# Altium PCB light.PcbDoc
Units mm, origin at the board's own origin, x right, y up, seen from the top; angles counter-clockwise.
Board outline 34.14 x 118.21 mm, 4 copper layers (Top Layer, GND-Layer 1, VCC-Layer 2, Bottom Layer); 90 components, 63 nets, 296 pads, 160 vias.
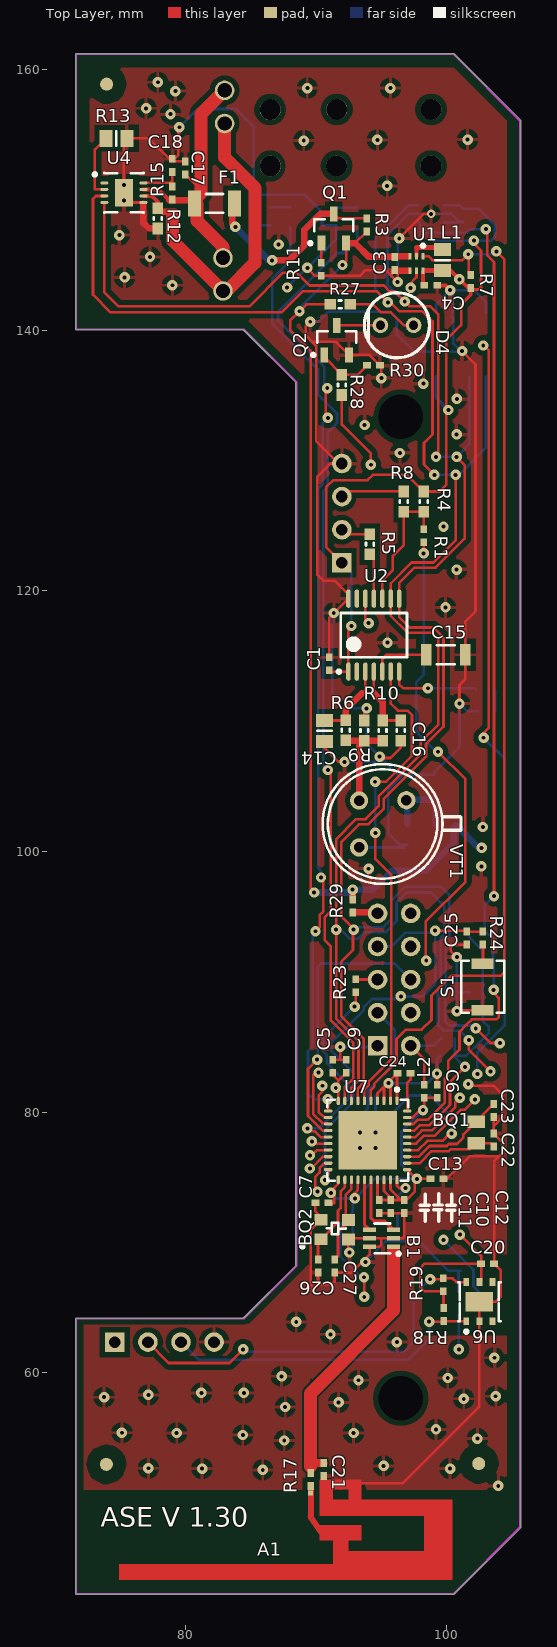
[diagram p0: Top Layer view]
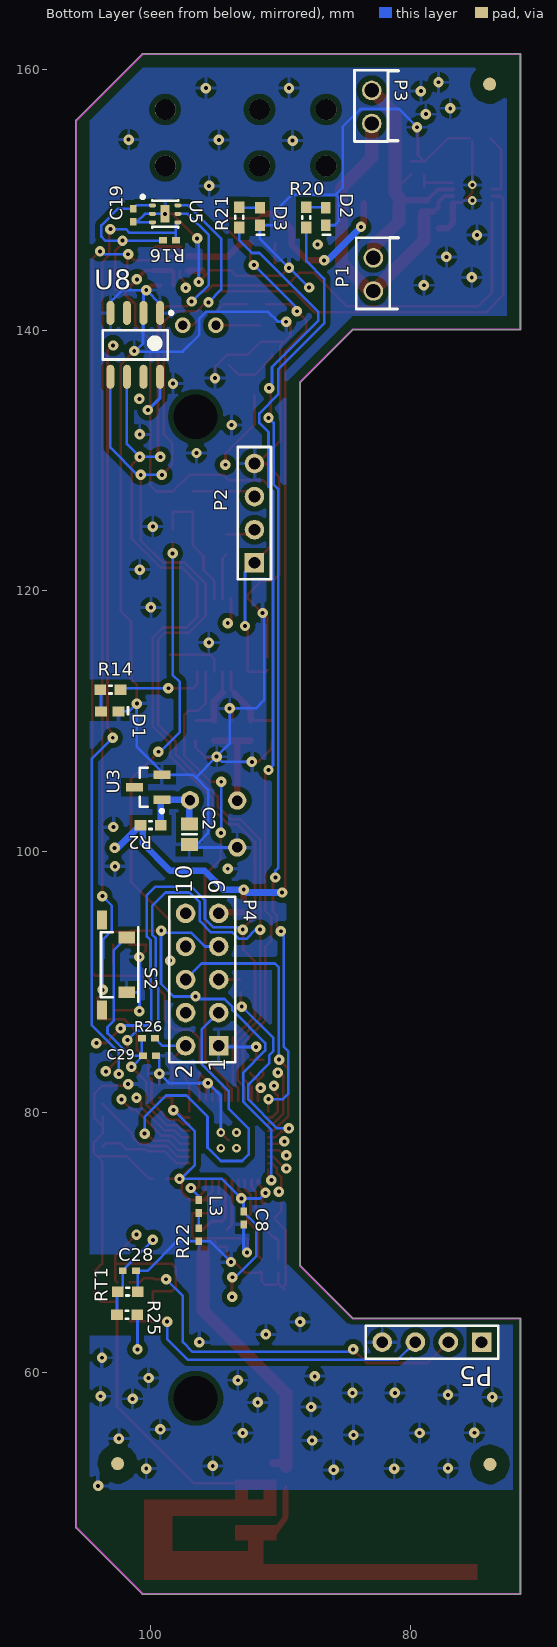
[diagram p1: Bottom Layer view, seen from below]
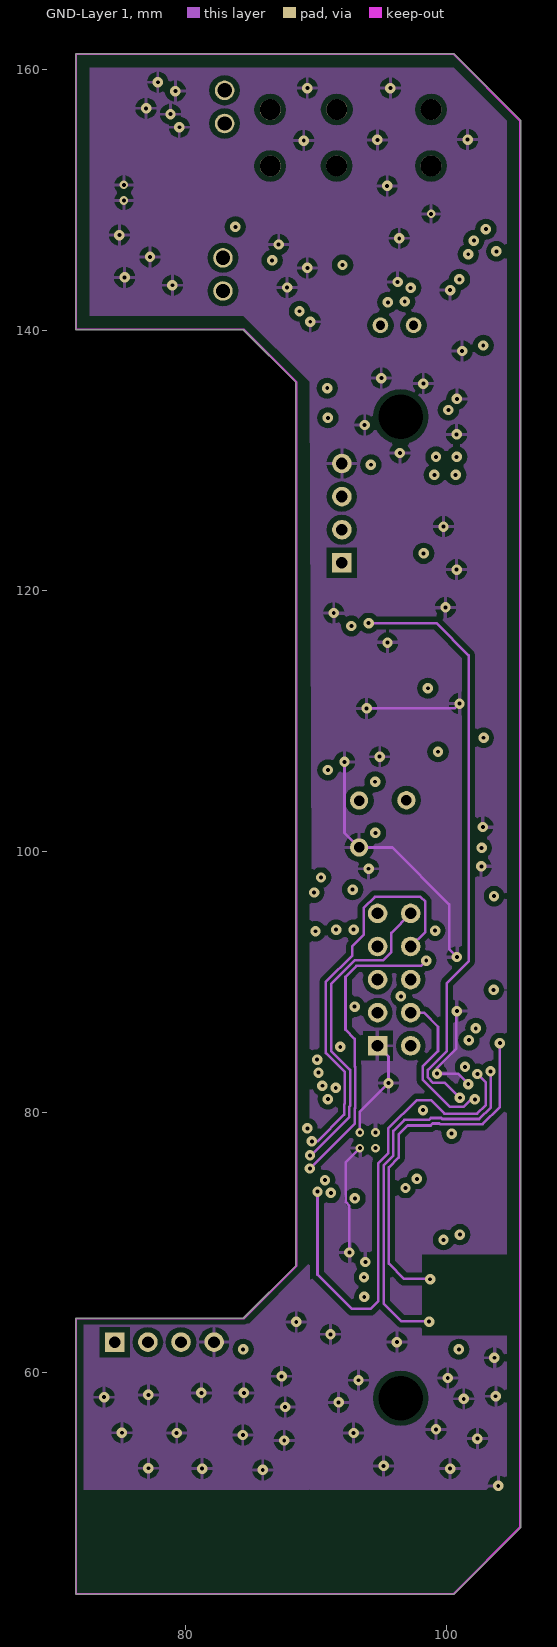
[diagram p2: GND-Layer 1]
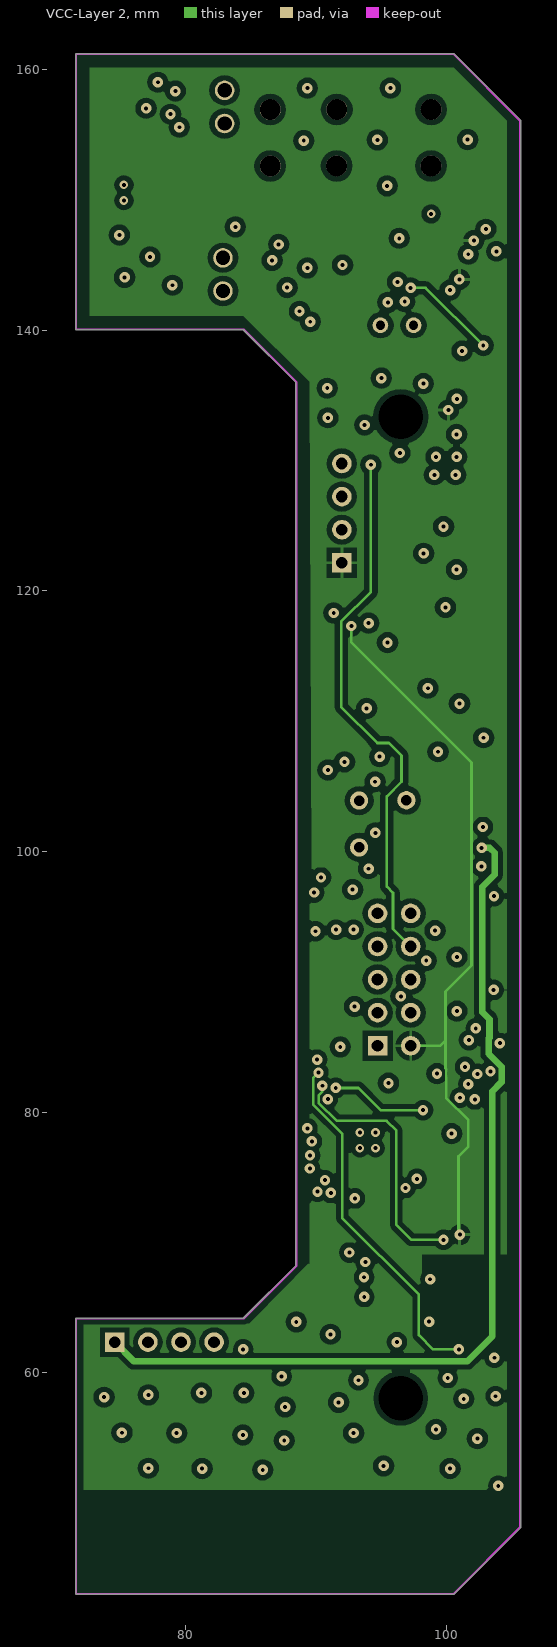
[diagram p3: VCC-Layer 2]

## Layer stack, top to bottom
Top Layer: signal copper 0.0356
Dielectric: core 0.32, FR-4, Dk 4.8
GND-Layer 1: signal copper 0.0356
Dielectric: prepreg 0.32, FR-4, Dk 4.8
VCC-Layer 2: signal copper 0.0356
Dielectric: core 0.32, FR-4, Dk 4.8
Bottom Layer: signal copper 0.0356

## Board outline
71.578,43.053 ccw(c71.628,43.053) 71.628,43.003 100.584,43.003 ccw(c100.584,43.053) 100.62,43.018 100.62,43.017 105.7,48.097 105.699,48.097 ccw(c105.664,48.133) 105.714,48.133 105.714,156.083 ccw(c105.664,156.083) 105.699,156.119 105.7,156.119 100.62,161.199 100.62,161.198 ccw(c100.584,161.163) 100.584,161.213 71.628,161.213 ccw(c71.628,161.163) 71.578,161.163 71.578,140.081 ccw(c71.628,140.081) 71.628,140.031 84.434,140.031 88.469,135.996 88.469,68.22 84.434,64.185 71.628,64.185 ccw(c71.628,64.135) 71.578,64.135

## Design rules (kind name [scope] priority, off if disabled: settings)
Clearance Clearance_2 [InNet('NetB1_1')] p1: gap=0.16
Clearance Clearance_1 [InPolygon] p2: gap=0.4
Clearance [All] p3: gap=0.2
PolygonConnect [All] p1: connectstyle=Relief reliefconductorwidth=0.254 reliefentries=4 polygonreliefangle="90 Angle"
RoutingVias [All] p1: holewidth=0.711 width=1.27 viastyle="Through Hole" minholewidth=0.711 minwidth=1.27 maxholewidth=0.711 maxwidth=1.27
SilkscreenOverComponentPads [All] p1: minsilkscreentomaskgap=0.254
SolderMaskExpansion [All] p1: expansion=0
Width [All] p1: maxlimit=1 minlimit=0.2 preferedwidth=0.254
27 further rules are at their usual default settings.

## Components (designator, comment, footprint, x,y, rotation, side; value= is the part's Value field where it differs from the comment)
A1 "ANT" "F ant" 89.85,51.025 r180 top
B1 "BALUN" 2450BM15A0002 95.05,70.325 r180 top
BQ1 "Crystal" FC-12M 102.3,78.45 r90 top
BQ2 "Crystal" 403C11A32M00000 91.525,71.05 r0 top
C1 "Capacitor" 0402 91.025,114.4 r90 top
C2 "Capacitor" 6-0805_L 97,101.325 r90 bottom
C3 "Capacitor" 0402 96.05,145.125 r270 top
C4 "Capacitor" 0402 98.825,143.45 r0 top
C5 "Capacitor" 0402 91.311,83.52 r90 top
C6 "Capacitor" 0402 99.3,81.6 r90 top
C7 "Capacitor" 0402 90.475,73.05 r180 top
C8 "Capacitor" 0402 92.837,71.865 r270 bottom
C9 "Capacitor" 0402 92.327,83.52 r90 top
C10 "Capacitor" 0402 95.758,72.754 r270 top
C11 "Capacitor" 0402 94.869,72.754 r270 top
C12 "Capacitor" 0402 96.774,72.754 r270 top
C13 "Capacitor" 0402 99.3,74.9 r0 top
C14 "Capacitor" 6-0805_L 90.65,109.25 r90 top
C15 "Capacitor" 1206 99.975,115.1 r180 top
C16 "Tantal Cap" 0603 96.525,109.275 r270 top
C17 "Capacitor" 0402 80,152.45 r90 top
C18 "Capacitor" 0402 79,152.65 r90 top
C19 "Capacitor" 0402 101.3,148.825 r270 bottom
C20 "Capacitor" 0402 103.182,68.379 r0 top
C21 "Capacitor" 0402 90.6,52.575 r270 top
C22 "Capacitor" 0402 103.65,77.85 r270 top
C23 "Capacitor" 0402 103.65,80.125 r90 top
C24 "Capacitor" 0402 96.775,83 r180 top
C25 "Capacitor" 0402 101.575,93.35 r270 top
C26 "Capacitor" 0402 90.17,68.182 r90 top
C27 "Capacitor" 0402 91.44,68.182 r90 top
C28 "Capacitor" 0402 101.6,67.825 r180 bottom
C29 "Capacitor" 0402 100.05,84.325 r180 bottom
D1 "Led" LED0603 103.1,110.75 r180 bottom
D2 "Led" LED0603 86.525,148.725 r270 bottom
D3 "Led" LED0603 91.583,148.726 r270 bottom
D4 "Led" TSHF5410 97.5,140.375 r180 top
F1 "Fuse, slow 0.2A" SF1206S0502 82.225,149.725 r0 top
L1 "Inductor" 6-0805_L 99.725,145.375 r270 top
L2 "Inductor" 0402 98.325,81.6 r270 top
L3 "Inductor" 0402 96.266,72.754 r90 bottom
P1 "Connector" BAT_CON 82.875,145.55 r270 bottom
P2 "Header 4" HDR1X4 92,122.15 r90 bottom
P3 "Connector" BAT_CON 83,158.4 r270 bottom
P4 "*" HDR2X5 94.742,85.09 r90 bottom
P5 "Header 4" HDR1X4 74.575,62.35 r0 bottom
Q1 "IRLML6302GTRPBF" SOT-23_N 91.375,147.8 r90 top
Q2 "KST3904MTF" SOT-23_N 91.6,139.225 r90 top
R1 "Resistor" 0402 98.275,124.225 r270 top
R2 "Resistor" 0603 99.975,102.025 r0 bottom
R3 "Blob" 0402 93.925,148.075 r90 top
R4 "Resistor" 0603 98.275,126.85 r270 top
R5 "Res" 0603 94.15,123.575 r90 top
R6 "Resistor" 0603 92.3,109.3 r270 top
R7 "Resistor" 0402 101.9,143.725 r90 top
R8 "Res" 0603 96.75,126.85 r90 top
R9 "Resistor" 0603 93.725,109.275 r270 top
R10 "Resistor" 0603 95.125,109.275 r270 top
R11 "Resistor" 0402 90.425,144.675 r270 top
R12 "Resistor" 0603 77.875,148.575 r270 top
R13 "Resistor" 6-0805_L 74.7,154.725 r0 top
R14 "Resister" 0603 103.05,112.425 r0 bottom
R15 "Resistor" 0402 79,150.525 r90 top
R16 "Resistor" 0402 98.525,146.9 r180 bottom
R17 "Blob" 0402 89.6,51.8 r270 top
R18 "Resistor" 0402 99.8,64.475 r90 top
R19 "Resistor" 0402 99.775,66.75 r270 top
R20 "Resister" 0603 88.025,148.65 r90 bottom
R21 "Resister" 0603 93.175,148.659 r90 bottom
R22 "Resistor" 0402 96.266,70.595 r270 bottom
R23 "Blob" 0402 93.075,89.7 r270 top
R24 "Resistor" 0402 102.825,93.35 r90 top
R25 "Resistor" 0603 101.775,64.45 r180 bottom
R26 "Resistor" 0402 100.125,85.675 r0 bottom
R27 "Resister" 0603 91.875,141.975 r0 top
R28 "Resister" 0603 92,135.8 r270 top
R29 "Blob" 0402 92.825,95.825 r90 top
R30 "Resistor" 0402 94.425,137.3 r0 top
RT1 "Thermistor" 0603 101.725,66.225 r180 bottom
S1 "Button" B3U-3000P 102.8,89.625 r270 top
S2 "Button" TL3330 101.8,91.3 r270 bottom
U1 "TPS62730" 6SON 97.725,145.125 r270 top
U2 "MSP430" TSOP14 94.45,116.6 r90 top
U3 "LM385M3-2.5" SOT23 100.15,104.925 r0 bottom
U4 "STC3100" DFN8 75.275,150.55 r0 top
U5 "MAX44009" QFN127P600-8N 98.85,148.925 r180 bottom
U6 "Hum\Temp Sensor" QFN6 102.547,65.458 r90 top
U7 "CC2530F256" QFN40 93.98,77.834 r270 top
U8 "M24M02" SO8 101.15,138.875 r270 bottom
VT1 "PIR sensor" TO5 95.123,102.108 r0 top

## Footprints (in the part's own frame and the unit in brackets; to place one, negate y for a bottom-side part, rotate by r counter-clockwise, add the part's x,y. Pads: shape width x height; smd on the part's side, far side on the other; paste and mask are expansions set on the pad)
6-0805_L [mm] "Chip Resistor, Body 2.0x1.2mm, IPC High Density"
  rect 1x1.3 smd: 1(-0.8,0) 2(0.8,0)
  silkscreen extent 0,-0.55 0,0.55, body extent -1.07,-0.7 1.07,0.7, height 0.7
6SON [mm] "IC DCDC CONV STP-DN SYNC LP 6SON"
  rect 0.5x0.25 smd: 1(-0.55,0.5) 2(-0.55,0) 3(-0.55,-0.5) 4(0.55,-0.5) 5(0.55,0) 6(0.55,0.5)
  silkscreen extent -1.47,0.38 -1.23,0.63, body extent -0.52,-0.75 0.53,0.75, height 0.6
0402 [mm] "Chip Capacitor, Body 1.0x0.5mm, IPC High Density"
  rect 0.6x0.5 smd: 1(-0.5,0) 2(0.5,0)
  body extent -0.55,-0.3 0.55,0.3, height 1.3
403C11A32M00000 [mm] "CRYSTAL 32MHZ 10PF SMD"
  rect 1x0.9 smd: 1(-1.125,-0.8) 2(0.975,-0.825) 3(0.975,0.675) 4(-1.125,0.7)
  silkscreen extent -2.67,-1.47 0.77,0.45, body extent -1.7,-1.22 1.53,1.15, height 0.85
0603 [mm] "0603, 2-Leads, Body 1,6x0,8mm, IPC High Density"
  rect 0.9x0.8 smd: 1(-0.775,0) 2(0.775,0)
  silkscreen extent -0.1,-0.3 0.1,0.3, body extent -0.8,-0.4 0.8,0.4, height 0.5
1206 [mm] "1206, 2-Leads, Body 3,2x1,6mm, IPC High Density"
  rect 0.8x1.65 smd: 1(-1.5,0) 2(1.5,0)
  silkscreen extent -0.7,-0.72 0.7,0.72, body extent -1.6,-0.8 1.6,0.8, height 0.5
2450BM15A0002 [mm]
  rect 1x0.35 smd: 1(-0.9,0.65) 2(-0.9,0) 3(-0.9,-0.65) 4(0.925,-0.65) 5(0.925,0) 6(0.925,0.65)
  silkscreen extent -1.43,-1.13 0.55,1.32, body extent -0.63,-1 0.63,1, height 0.7
B3U-3000P [mm] "Button, 2-Leads, Body 4,0x3,2mm, IPC High Density"
  rect 0.8x1.7 smd: 1(-1.775,0) 2(1.8,0)
  silkscreen extent -2,-1.65 2,1.65, body extent -2,-1.6 2,1.6, height 1.2
BAT_CON [mm]
  round 1.5 hole 1.1: 1(0,0) 2(2.54,0)
  silkscreen extent -1.55,-1.33 3.92,1.25
DFN8 [mm]
  oval 0.6x0.25 smd: 1(-1.5,0.75) 2(-1.5,0.25) 3(-1.5,-0.25) 4(-1.5,-0.75) 5(1.5,-0.75) 6(1.5,-0.25) 7(1.5,0.25) 8(1.5,0.75)
  rect 1.4x2.1 smd: 9(0,0)
  silkscreen extent -2.35,-1.53 1.5,1.53, body extent -1.5,-1.5 1.5,1.5, height 0.9
"F ant" [mm] "F antenna 2.4Ghz"
  rect 0.4x0.4 smd paste+0: 1(0.254,0.254)
  rect 3x0.01 smd: 2(-2.032,0)
  Top Layer region: -3.65,0 -2.65,0 -2.65,0.74 -3.65,0.74
  Top Layer region: -1.45,0 -0.45,0 -0.45,0.74 -1.45,0.74
  Top Layer region: -2.65,3.9 -1.45,3.9 -1.45,4.7 -2.65,4.7
  Top Layer region: -8.453,0.739 -3.653,0.739 -3.653,2.029 -8.453,2.029
  Top Layer region: -10.63,4.7 -1.45,4.7 -1.45,5.7 -10.63,5.7
  Top Layer region: -10.63,5.7 14.95,5.7 14.95,6.91 -10.63,6.91
  Top Layer region: -10.63,0.74 -8.45,0.74 -8.45,4.7 -10.63,4.7
  Top Layer region: -3.65,2.69 -0.45,2.69 -0.45,3.9 -3.65,3.9
  Top Layer region: -3.65,0.74 -0.45,0.74 -0.45,2.03 -3.65,2.03
  Top Layer region: 0,0 0.46,0 0.46,2.03 0,2.03
  Top Layer region: 0,2.03 0.379,2.29 -0.577,3.681 -0.956,3.42
  Top Layer region: 0,2.03 0.46,2.03 0.379,2.291
FC-12M [mm]
  rect 0.95x1.35 smd: 1(-0.825,0) 2(0.825,0)
  body extent -1.02,-0.6 1.02,0.6, height 0.6
HDR1X4 [mm] "Connector; Header; 4 Position"
  rect 1.5x1.5 hole 0.9: 1(0,0)
  round 1.5 hole 0.9: 2(2.54,0) 3(5.08,0) 4(7.62,0)
  silkscreen extent -1.27,-1.27 8.89,1.27
HDR2X5 [mm] "Connector; Header; 5x2 Position"
  rect 1.5x1.5 hole 0.9: 1(0,0)
  round 1.5 hole 0.9: 2(0,2.54) 3(2.54,0) 4(2.54,2.54) 5(5.08,0) 6(5.08,2.54) 7(7.62,0) 8(7.62,2.54) 9(10.16,0) 10(10.16,2.54)
  silkscreen extent -1.27,-1.27 11.43,3.81
LED0603 [mm] "Molded Diode, 2-Leads, Body 1,7x0,9mm, IPC High Density"
  rect 0.9x0.75 smd: 1(-0.675,0) 2(0.675,0)
  silkscreen extent 1.4,-0.23 1.4,0.32, body extent -0.9,-0.5 0.9,0.5, height 0.85
QFN6 [mm] "QFN, 6-Leads, Body 3,0x3,0mm (max), Pitch 1,00mm, IPC High Density"
  rect 0.6x0.45 smd: 1(-1.5,1) 2(-1.5,0) 3(-1.5,-1) 4(1.5,-1) 5(1.5,0) 6(1.5,1)
  rect 1.5x2.1 smd: 7(0,0)
  silkscreen extent -2.42,-1.63 1.5,1.63, body extent -1.5,-1.5 1.5,1.5, height 0.9
QFN40 [mm]
  oval 0.65x0.25 smd: 1(-3.025,2.25) 2(-3.025,1.75) 3(-3.025,1.25) 4(-3.025,0.75) 5(-3.025,0.25) 6(-3.025,-0.25) 7(-3.025,-0.75) 8(-3.025,-1.25) 9(-3.025,-1.75) 10(-3.025,-2.25) 21(3.025,-2.25) 22(3.025,-1.75) 23(3.025,-1.25) 24(3.025,-0.75) 25(3.025,-0.25) 26(3.025,0.25) 27(3.025,0.75) 28(3.025,1.25) 29(3.025,1.75) 30(3.025,2.25)
  oval 0.25x0.65 smd: 11(-2.25,-3.025) 12(-1.75,-3.025) 13(-1.25,-3.025) 14(-0.75,-3.025) 15(-0.25,-3.025) 16(0.25,-3.025) 17(0.75,-3.025) 18(1.25,-3.025) 19(1.75,-3.025) 20(2.25,-3.025) 31(2.25,3.025) 32(1.75,3.025) 33(1.25,3.025) 34(0.75,3.025) 35(0.25,3.025) 36(-0.25,3.025) 37(-0.75,3.025) 38(-1.25,3.025) 39(-1.75,3.025) 40(-2.25,3.025)
  rect 4.5x4.5 smd: 41(0,0)
  silkscreen extent -4.02,-3.1 3.1,3.1, body extent -3.08,-3.08 3.08,3.08, height 1
QFN127P600-8N [mm]
  oval 0.55x0.3 smd: 1(-0.975,0.65) 2(-0.975,0) 3(-0.975,-0.65) 4(0.975,-0.65) 5(0.975,0) 6(0.975,0.65)
  rect 0.7x1.35 smd: 7(0,0)
  silkscreen extent -1.85,-1.05 1,1.42, body extent -1,-1 1,1, height 0.6
SF1206S0502 [mm] "FUSE BOARD MNT 500MA 63VDC 1206"
  rect 1x2 smd: 1(-1.55,0) 2(1.55,0)
  silkscreen extent -0.65,-0.72 0.65,0.72, body extent -1.55,-0.77 1.55,0.77, height 0.6
SO8 [mm] "SOIC, 8-Leads, Body 5,0x4,0mm (max), Pitch 1,27mm, IPC High Density"
  oval 1.85x0.6 smd: 1(-2.45,1.905) 2(-2.45,0.635) 3(-2.45,-0.635) 4(-2.45,-1.905) 5(2.45,-1.905) 6(2.45,-0.635) 7(2.45,0.635) 8(2.45,1.905)
  silkscreen extent -2.57,-2.5 1.12,2.88, body extent -2,-2.5 2,2.5, height 1.75
SOT23 [mm]
  rect 1.3x0.65 smd: 1(-1.05,0.95) 2(-1.05,-0.95) 3(1.05,0)
  silkscreen extent -1.17,-1.5 0.65,1.95, body extent -0.65,-1.5 0.65,1.5, height 1
SOT-23_N [mm] "SOT23, 3-Leads, Body 2.9x1.3mm, Pitch 0.95mm, Lead Span 2.5mm, IPC Medium Density"
  rect 1.15x0.6 smd: 1(-1.125,0.95) 2(-1.125,-0.95) 3(1.125,0)
  silkscreen extent -1.25,-1.5 0.7,1.92, body extent -0.7,-1.5 0.7,1.5, height 1.1
TL3330 [mm] "SWITCH TACTILE SPST-NO 0.05A 12V"
  rect 0.9x1.27 smd: 1(-2.1,0) 2(2.1,0)
  rect 1.45x0.8 smd: 3(-3.45,-1.9) 3(3.45,-1.9)
  silkscreen extent -2.88,-1.97 2.83,0.87, body extent -3.88,-2.42 3.8,0.78, height 3.4
TO5 [mm]
  round 1.4 hole 0.8: 1(1.825,1.825) 2(-1.8,1.8) 3(-1.8,-1.8)
  silkscreen extent -4.6,-4.6 6.02,4.6, body extent -4.56,-4.59 4.6,4.59, height 4.8
TSHF5410 [mm] "EMITTER IR 5MM HI SPEED 890NM"
  round 1.2 hole 0.7: 1(0,0) 2(2.54,0)
  silkscreen extent -1.23,-2.5 3.77,2.5, body extent -1.23,-2.5 3.75,2.5, height 8.7
TSOP14 [mm] "TSOP, 14-Leads, Body 5,1x4,5mm (max), Pitch 0,65mm, IPC High Density"
  oval 1.4x0.35 smd: 1(-2.8,1.95) 2(-2.8,1.3) 3(-2.8,0.65) 4(-2.8,0) 5(-2.8,-0.65) 6(-2.8,-1.3) 7(-2.8,-1.95) 8(2.8,-1.95) 9(2.8,-1.3) 10(2.8,-0.65) 11(2.8,0) 12(2.8,0.65) 13(2.8,1.3) 14(2.8,1.95)
  silkscreen extent -2.92,-2.55 1.7,2.8, body extent -2.25,-2.55 2.25,2.55, height 1.2

## Part data
A1: "Inverted-F Antenna"
B1: "BALUN JTI MATCHED ZIGBEE"
BQ1: library part 6LC:308C, "CRYSTAL 32.768KHZ 12.5PF SMD"
BQ2: library part HC-49SMD, "CRYSTAL 32MHZ 10PF SMD"
C1 C7 C8 C9 C10 C11 C12 C13 C19 C20 C25 C28 C29: library part Cap, "CAP CER 0.1UF 10V 20% X5R 0402"
C2 C14: library part Cap, "CAP FILM 0.1UF 16VDC 0805"
C3 C4 C5: library part Cap, "CAP CER 2.2UF 6.3V 20% X5R 0402"
C6 C17 C24: library part Cap, "CAP CER 1UF 6.3V 10% X5R 0402"
C15: library part Cap, "CAP FILM 0.47UF 16VDC 1206"
C16: library part "Cap Pol2", "CAP CER 10UF 6.3V 20% X5R 0603"
C18: library part Cap, "CAP CER 0.22UF 10V 10% X5R 0402"
C21: library part Cap, "CAP CER 0.5PF 50V NP0 0402"
C22 C23: library part Cap, "CAP CER 22PF 50V 5% NP0 0402"
C26 C27: library part Cap, "CAP CER 15PF 50V 5% NP0 0402"
D1: library part LED0, "LED YELLOW ROUND CLEAR SMD"
D2: library part LED0, "LED RED ROUND CLEAR SMD"
D3: library part LED0, "LED GREEN CLEAR THIN 0603 SMD"
D4: library part LED0, "EMITTER IR 5MM HI EFF 940NM"
F1: library part "Fuse 2", "FUSE .200A 125V FAST 1206"
L1: "INDUCTOR 2.2UH 0805"
L2: "FILTER CHIP 1000 OHM 250MA 0402"
L3: "INDUCTOR 6.8NH 300MA 0402"
P1 P3: library part "Header 2", "CONN HEADER VERT 2POS .100 TIN"
P2 P5: "CONN HEADER 4POS .100 STR TIN"
P4: library part "Header 5X2", "CONN HEADER VERT DUAL 10POS GOLD"
Q1: library part IRLML6302, "HEXFET Power MOSFET"
Q2: library part 2N3904, "TRANSISTOR NPN 40V 200MA SOT-23"
R1: library part Res3, "RES 100 OHM 1/10W 5% 0402 SMD"
R2: library part Res3, "RES 47K OHM 1/10W 5% 0603 SMD"
R3 R17 R23 R29: library part Res3, "RES 0.0 OHM 1/10W JUMP 0402 SMD"
R4 R10: library part Res3, "RES 100K OHM 1/10W 5% 0603 SMD"
R5 R8: library part Res3, "RES 27 OHM 1/10W 5% 0603"
R6: library part Res3, "RES 1.0K OHM 1/10W 5% 0603 SMD"
R7 R11 R16 R30: library part Res3, "RES 10K OHM 1/10W 5% 0402 SMD"
R9: library part Res3, "RES 300K OHM 1/10W 5% 0603 SMD"
R12: library part Res3, "RES 0.02 OHM 1/4W 1% 0603"
R13: library part Res3, "RES 200K OHM 1/8W .1% 0805 SMD"
R14 R20 R21: library part Res3, "RES 200 OHM 1/10W 5% 0603 SMD"
R15: library part Res3, "RES 1K OHM 1/10W 1% 0402 SMD"
R18 R19 R24: library part Res3, "RES 2.7K OHM 1/10W 5% 0402 SMD"
R22 R26: library part Res3, "RES 56K OHM 1/10W 1% 0402 SMD"
R25: library part Res3, "RES 2.0K OHM 1/10W 5% 0603 SMD"
R27 R28: library part Res3, "RES 100 OHM 1/10W 5% 0603 SMD"
RT1: library part "Res Thermal", "THERMISTOR NTC 1K OHM 5% 0603"
S1: library part SW-PB, "SWITCH TACTILE"
S2: library part SW-PB, "SWITCH TACTILE SPST-NO 0.05A 12V"
U1: "IC DCDC CONV STP-DN SYNC LP 6SON"
U2: library part MSP430F20x3, "MIXED SIGNAL MICROCONTROLLER"
U3: "Micropower Voltage Reference Diode, 3-pin SOT-23"
U4: "IC BATTERY MON W/GAUGE 8-DFN"
U5: "SENSOR AMBIENT LIGHT 6UTDFN"
U6: library part HTU21D, "Miniature Relative Humidity and Temperature Sensor"
U7: "IC SOC IEEE 802.15.4/ZIG 40VQFN"
U8: "IC EEPROM 2MBIT 1MHZ 8SO"
VT1: library part PIR_Sensor

## Free pads (board coordinates)
  round 1.6 hole 1.6: 0(86.5,152.6) 0(86.5,156.925) 0(91.6,152.609) 0(91.608,156.934) 0(98.841,152.609) 0(98.849,156.934)
  round 1.524 hole 3.4: 0(96.52,58.039) 0(96.52,133.35)
  round 1 smd mask+1: 1(73.925,52.975) 1(73.95,158.875) 1(102.5,53.025)
  round 1 smd far side mask+1: 1(73.925,52.975) 1(73.95,158.875) 1(102.5,53.025)

## Via types
v1: diameter 0.8, hole 0.3, Top Layer to Bottom Layer, 153 vias
v2: diameter 0.66, hole 0.3, Top Layer to Bottom Layer, tented top, 7 vias

## Nets (pads, with @x,y where several pads share a name; then routed paths per layer and width w, separated by ;. In a path a pad name is that pad's centre, name@x,y a point inside that pad or via, vN(x,y) a via of type N, cw(c..) or ccw(c..) an arc to the next point about the centre after c; other vN are vias at no path point)
BAT_VCC: C3.1 P5.1 Q1.2 R2.2 R3.1 R27.1 R29.2 U1.3 | length 148.5
  Top Layer w0.2: v1(89.875,96.85) 89.625,97.1 89.625,138.4 88.025,140 88.025,140.725 v1(88.75,141.45) 89.275,141.975 R27.1 ; v1(92.051,145) 92.325,145.275 Q1.2 ; 93.025,146.675 R3.1
  Top Layer w0.508: Q1.2 93.025,146.675 94.075,145.625 C3.1 ; R29.2 v1(92.825,97.075) ; C3.1@96.075,145.675 97.05,145.675
  VCC-Layer 2 w0.508: P5.1 76.05,60.875 101.625,60.875 103.55,62.8 103.55,81.6 104.259,82.309 104.259,83.483 103.271,84.471 103.271,85.654 103.325,85.708 103.325,87.125 102.775,87.675 102.775,97.275 103.725,98.225 103.725,99.9 103.35,100.275 v1(102.725,100.275)
  Bottom Layer w0.2: v1(88.75,141.45) 88.75,141.7 v1(92.051,145)
  Bottom Layer w0.508: v1(89.875,96.85) 92.6,96.85 v1(92.825,97.075) 94.375,97.075 95.825,98.525 98.475,98.525 100.575,100.625 100.575,101.85 R2.2 102.5,100.275 v1(102.725,100.275)
CC2530_CLK: P4.6 U7.14 | length 21.9
  Top Layer w0.2: v1(90.104,84.029) 89.4,83.325 89.4,79.707 90.523,78.584 U7.14
  Bottom Layer w0.2: v1(90.104,84.029) 90.15,84.075 90.15,91.125 90.425,91.4 96.052,91.4 P4.6 P4.6@97.67,90.17
CC2530_DC: P4.3 U7.34 | length 30.5
  Top Layer w0.2: U7.34 97.848,77.084 98.564,77.8 99.725,77.8 100.275,78.35 v1(100.425,78.35)
  Bottom Layer w0.2: P4.3 96.05,86.322 96.05,83.7 93.975,81.625 93.975,80.275 92.45,78.75 92.45,76.75 92.95,76.25 94.575,76.25 95.6,77.275 95.6,79.65 97.225,81.275 98.775,81.275 100.425,79.625 v1(100.425,78.35)
CC2530_DD: P4.4 U7.35 | length 18.8
  Top Layer w0.2: U7.35 97.697,77.584 98.313,78.2 99.14,78.2 101.132,80.193 101.443,80.193 102.225,80.975 v1(102.2,80.975)
  GND-Layer 1 w0.2: P4.4 98.295,87.63 99.375,86.55 99.375,84.675 98.2,83.5 98.2,82.497 100.297,80.4 101.34,80.4 101.915,80.975 v1(102.2,80.975)
CC2530_MISO: P4.10 U7.17 | length 25.9
  Top Layer w0.2: v1(89.554,76.679) 89.554,76.673 89.55,76.673 89.55,76.725 89.65,76.825 89.84,76.825 90.099,77.084 U7.17
  GND-Layer 1 w0.2: v1(89.554,76.679) 89.619,76.679 92.575,79.635 92.575,80.425 92.629,80.479 92.629,83.246 91.175,84.7 91.175,89.841 92.994,91.66 95.177,91.66 95.792,92.275 95.792,93.76 P4.10
CC2530_MOSI: P4.8 R28.2 U7.16 | length 79.5
  Top Layer w0.2: v1(89.7,77.75) 89.7,77.675 89.609,77.584 U7.16 ; R28.2 92,132.75 94.225,130.525 v1(94.225,129.675)
  GND-Layer 1 w0.2: v1(89.7,77.75) 90.124,77.75 92.175,79.801 92.175,80.591 92.229,80.645 92.229,83.08 90.775,84.534 90.775,90.006 92.797,92.028 92.797,92.73 93.692,93.625 93.692,95.685 94.532,96.525 98.025,96.525 98.4,96.15 98.4,93.828 P4.8
  VCC-Layer 2 w0.2: v1(94.225,129.675) 94.225,119.925 91.95,117.65 91.95,111.1 94.725,108.325 95.6,108.325 96.575,107.35 96.575,105.35 95.45,104.225 95.45,97.3 95.925,96.825 95.925,94.067 P4.8
CC2530_RESET: C25.1 P4.7 R24.2 U7.20 | length 36.1
  Top Layer w0.2: v1(90.704,74.779) 90.704,74.69 90.65,74.636 90.65,74.914 90.955,75.219 U7.20 ; v1(99.15,93.925) 101.5,93.925 C25.1 R24.2
  Bottom Layer w0.2: v1(90.704,74.779) 90.704,78.639 92.875,80.809 92.875,83.01 91.175,84.71 91.175,85.31 93.692,87.827 93.692,88.065 94.307,88.68 96.33,88.68 v1(96.525,88.875) 98.2,88.875 99.175,89.85 99.175,93.9 v1(99.15,93.925) 98.985,93.76 96.847,93.76 95.797,92.71 P4.7
CC2530_SS: R23.2 U7.15 | length 16.2
  Top Layer w0.2: v1(89.354,78.754) v1@89.405,78.703 ; U7.15 90.366,78.084 89.921,78.529 v1@89.554,78.529 ; v1(92.975,88.1) 93.075,88.2 R23.2 ; v1@89.405,78.703 89.554,78.554 v1@89.554,78.529 ; v1@89.405,78.703 89.405,78.678 v1@89.554,78.529
  Bottom Layer w0.2: v1(89.354,78.754) 90.254,78.754 92.475,80.975 92.475,82.125 90.85,83.75 90.85,84.375 90.55,84.675 90.55,85.675 v1(92.975,88.1)
CC_VCC: C5.1 C6.1 C7.1 C8.1 C9.1 C10.1 C11.1 C12.1 C13.1 L2.2 U7.10 U7.21 U7.24 U7.27 U7.28 U7.29 U7.31 U7.39 | length 52.3
  Top Layer w0.2: C7.1@91.175,73.025 91.425,73.025 91.425,74.2 91.73,74.505 U7.21 ; C5.1 91.311,82.842 91.73,82.423 ; v1(91.529,81.854) 91.733,82.073 v1@91.73,82.07 ; U7.10 v1@91.73,82.07 ; C9.1 91.73,82.423 ; v1@92.964,73.77 93.23,74.036 U7.24 ; v1(93.72,65.82) v1@93.72,67.395 ; U7.27 94.73,73.393 C11.1 C10.1 ; U7.28 95.23,73.945 95.758,73.417 C10.1 ; U7.29 95.73,74.07 C12.1@96.546,73.254 ; U7.31 v1@97.714,74.875 ; U7.39 97.434,79.584 98.325,80.475 L2.2 C6.1 ; C13.1@98.775,74.875 v1(97.75,74.875) ; v1@91.73,82.07 91.73,82.423 ; C10.1 C12.1@96.546,73.254 ; C12.1@96.546,73.254 C12.1 96.945,73.254 97.58,73.889 97.58,74.705 v1@97.675,74.8 ; v1@97.675,74.8 97.825,74.8 v1(97.75,74.875) ; v1@97.675,74.8 v1(97.75,74.875) ; v1@97.675,74.8 97.55,74.8 97.625,74.875 v1@97.714,74.875 ; v1@97.714,74.875 v1(97.75,74.875)
  VCC-Layer 2 w0.2: v1(91.529,81.854) 93.271,81.854 94.975,80.15 v1(98.225,80.15)
  Bottom Layer w0.2: v1(91.15,73.8) 91.575,73.375 v1(93,73.375) ; v1(93.7,67.328) 93.482,67.328 91.875,68.935 91.875,71.377 92.837,72.339 C8.1 92.837,73.212 v1(93,73.375) ; v1(98.225,80.15) 96.575,78.5 96.575,75.95 v1@97.646,74.879 ; v1(93,73.375) 94.504,74.879 v1@97.646,74.879 ; v1@97.646,74.879 97.65,74.875 v1(97.75,74.875) 97.746,74.879 v1@97.646,74.879
GND: A1.2 B1.2 B1.5 B1.6 BQ2.2 BQ2.4 C1.2 C2.1 C3.2 C4.2 C5.2 C6.2 C7.2 C8.2 C9.2 C10.2 C11.2 C12.2 C13.2 C14.1 C15.1 C16.2 C17.2 C18.2 C19.2 C20.2 C21.2 C22.1 C23.1 C24.2 C25.2 C26.1 C27.1 C28.2 C29.2 D1.2 D2.2 D3.2 P2.4 P4.1 P5.4 Q2.2 R9.1 R11.2 R12.2 R13.2 R22.2 R30.2 RT1.2 S1.2 S2.2 U1.4 U2.14 U3.2 U4.5 U4.9 U5.2 U5.3 U5.7 U6.2 U6.7 U7.1 U7.2 U7.3 U7.4 U7.41 U8.1 U8.2 U8.4 VT1.3 | length 375.2
  Top Layer w0.2: R13.2@75.275,154.5 v2(75.275,151.15) U4.9 76.025,149.8 U4.5 ; R13.2 77.15,154.725 78.95,152.925 C18.2@78.975,152.95 ; R12.2@77.85,147.825 R12.2 ; v1(79.525,155.575) 79.45,155.5 79.45,153.425 C18.2@78.975,152.95 ; C17.2 C18.2@78.975,152.95 ; v1(89.35,144.775) 89.95,144.175 R11.2 93.4,144.175 93.825,144.6 95.35,144.6 95.837,144.113 ; v1(89.575,140.65) 89.238,140.313 89.238,139.587 89.725,139.1 ; 89.725,66.375 89.862,66.513 ; C7.2 89.95,73.025 89.95,72.422 BQ2.4@90.442,71.93 ; C26.1 90.17,66.97 ; BQ2.4 89.6,70.95 89.6,66.775 89.862,66.513 ; C14.1 90.65,107.95 91.725,106.875 v1(92.2,106.875) ; C1.2 91.025,117.925 U2.14 92.5,119.725 91.45,120.775 90.575,120.775 90.1,121.25 90.1,128.725 91.145,129.77 P2.4 91.755,129.77 90.025,131.5 90.025,138.8 89.725,139.1 ; C5.2 91.875,84.02 ; C27.1@91.559,67.801 C27.1 ; v1(91.875,85) 91.875,84.02 ; C9.2 91.875,84.02 ; BQ2.2 92.5,69.35 v1@92.75,69.1 ; BQ2.2@92.622,70.325 B1.5 95.025,70.325 ; 93.05,51.525 96.675,51.525 102.547,57.397 U6.2 U6.7 103.808,65.458 104.2,65.85 104.2,67.861 C20.2 103.682,76.232 104.05,76.6 ; R9.1 93.725,110.8 v1(93.9,110.975) ; v2(94.58,78.434) U7.41 U7.41@94.73,78.584 ; U7.4 94.73,81.455 95.23,81.955 ; C11.2 C10.2 C12.2 96.774,70.449 96.65,70.325 B1.2 95.025,70.325 ; R30.2 94.125,138.1 Q2.2 91.55,139.1 89.725,139.1 ; v1(95.025,136.325) R30.2@95.025,137.2 ; v1@95.125,107.175 95.725,107.175 96.525,107.975 C16.2 ; U7.3 95.23,81.955 ; U7.2 v1@95.73,82.455 ; U7.1 C24.2@96.23,82.955 ; C24.2 C24.2@96.23,82.955 ; v1(96.4,147.05) 98.275,148.925 v2(98.85,148.925) ; C6.2 v1@99.3,82.825 ; C13.2 100.075,74.9 101.775,76.6 104.05,76.6 ; v1(100.3,143.075) v1@100.4,142.975 ; v1(100.825,87.75) 100.9,87.825 S1.2 ; v1(100.825,91.9) 100.35,92.375 100.35,92.825 100.325,92.85 C25.2 ; v1(101.025,111.35) 101.025,112.775 101.475,113.225 C15.1 101.475,117.65 102.25,118.425 102.25,137.375 v1(101.225,138.4) ; v1@101.7,82.025 103.65,82.025 104.3,81.375 104.3,79.575 103.712,78.987 103.65,78.987 ; C23.1 103.65,78.987 ; 89.862,66.513 90.17,66.82 90.17,66.97 ; 90.17,66.97 90.39,66.75 91.2,66.75 91.44,66.99 C27.1 ; C27.1 92.732,67.682 94.125,69.075 B1.6 94.875,69.675 95.025,69.825 95.025,70.325 ; 95.23,81.955 v1@95.73,82.455 ; v1@95.73,82.455 C24.2@96.23,82.955 ; 95.837,144.113 95.837,144.463 C3.2 96.275,144.4 v1(96.275,143.7) 95.863,144.113 95.837,144.113 ; 103.65,78.987 C22.1 104.325,77.675 104.325,76.875 104.05,76.6
  Top Layer w0.3: C4.2@99.225,143.425 99.95,143.425 v1(100.3,143.075)
  Top Layer w0.5: U4.5@76.775,149.7 76.775,148.225 77.175,147.825 R12.2@77.85,147.825
  Top Layer w0.508: C3.2@95.975,144.575 U1.4@97.1,144.575
  GND-Layer 1 w0.2: v1(92.2,106.875) 92.2,101.431 VT1.3 95.867,100.308 100.225,95.95 100.225,92.5 v1(100.825,91.9) ; v1(92.575,69.225) 92.575,72.81 92.3,73.085 92.3,76.154 v2(93.38,77.234) ; v2(93.38,78.434) 93.38,80.03 v1(95.575,82.225) 95.575,84.257 P4.1 ; v1(93.9,110.975) 100.65,110.975 v1(101.025,111.35) ; v1(100.825,87.75) 100.775,87.8 100.775,84.85 99.3,83.375 v1(99.3,82.953) 100.9,82.953 v1(101.7,82.153)
  Bottom Layer w0.2: v1(79.525,155.575) 80.925,156.975 83.875,156.975 85.225,155.625 85.225,150.95 85.775,150.4 ; D2.2 85.85,148.05 85.525,148.375 85.525,150.15 85.775,150.4 ; v1(87.8,143.275) 89.3,144.775 v1(89.35,144.775) 91.583,147.008 D3.2 90.474,148.051 90.473,148.05 90.473,149.052 89.125,150.4 85.775,150.4 ; v1(89.575,140.65) 90.2,140.65 90.95,141.4 95.725,141.4 96.225,140.9 96.225,139.65 97.525,138.35 101.175,138.35 100.55,138.975 100.55,140.9 U8.2@100.4,141.05 ; v1(91.375,118.3) 91.25,118.175 91.25,111.625 91.9,110.975 v1(93.9,110.975) 93.9,108.275 v1(94.9,107.275) ; v1(91.875,85) P4.1@94.652,85 ; v1(92.2,106.875) 94.5,106.875 v1(94.9,107.275) ; v1(92.575,69.225) 92.625,69.225 92.75,69.1 92.837,69.187 C8.2 ; VT1.3 96.783,100.308 C2.1 96.425,100.525 95.55,101.4 95.55,104.725 96.488,105.663 ; v1(93.8,68.5) 95.395,70.095 R22.2 97.93,70.095 100.2,67.825 C28.2 ; v2(94.58,78.434) 94.58,81.23 v1(95.575,82.225) 98.573,82.225 v1(99.3,82.953) 99.3,84.075 C29.2 ; v1(96.275,143.7) v1@96.275,146.925 ; v2(98.85,148.925) U5.2 100.4,148.925 101,148.325 C19.2 101.25,148.275 U5.3 ; U8.1 99.245,142.02 v1(100.3,143.075) 102.125,143.075 103.055,142.145 U8.4 ; U8.2 v1@100.515,142.86 ; v1(100.825,87.75) v1(100.825,91.9) ; 100.85,89.2 S2.2 ; RT1.2 C28.2@100.95,67.675 ; D1.2 101.625,110.75 101.025,111.35 101.025,108.025 99.1,106.1 U3.2 96.7,105.875 96.488,105.663 ; v1(94.9,107.275) 96.488,105.688 96.488,105.663
  other v1: 104,51.325 85.925,52.55 81.275,52.65 100.3,52.65 77.15,52.675 95.2,52.85 87.575,54.8 102.4,54.95 84.4,55.225 79.325,55.375 92.9,55.375 75.125,55.4 99.225,55.65 87.65,57.375 91.75,57.725 101.35,58 73.75,58.125 103.8,58.2 77.15,58.3 81.225,58.45 84.475,58.45 93.275,59.425 100.125,59.6 87.375,59.725 103.7,61.15 96.225,62.35 91.125,62.95 88.5,63.9 94.05,98.675 102.7,98.85 102.825,101.875 95.5,116.025 99.95,118.725 100.8,121.625 99.8,124.925 96.45,130.575 100.8,132 93.75,132.725 100.825,134.725 98.25,135.9 79,143.45 75.325,144.05 77.275,145.625 87.15,146.575 74.925,147.3 95.475,151.075 89.075,154.55 94.725,154.6 101.65,154.625 78.85,156.575 76.975,157.025 79.225,158.35 89.35,158.575 95.725,158.575 77.875,159.025
  other v2: 94.58,77.234 75.275,149.95
LED1: R21.1 U7.11 | length 75.1
  Top Layer w0.2: v1(89.975,93.875) 90.3,94.2 90.3,95.13 90.575,95.405 90.575,97.825 v1(90.4,98) ; v1@90.763,133.138 90.763,135.337 90.975,135.55 v1(90.875,135.55) ; U7.11 90.955,80.665 90.975,80.685 90.975,81.265 90.955,81.285 v1@90.955,81.306
  Bottom Layer w0.2: v1(89.975,93.875) 89.75,93.65 89.75,85.01 89.404,84.665 89.404,81.421 89.825,81 v1(90.925,81) ; v1(90.4,98) 90.4,98.5 90.175,98.725 90.175,127.816 90.525,128.166 90.525,132.875 v1(90.925,133.275) ; v1@90.925,135.6 90.65,135.875 90.65,137.175 87.1,140.725 87.1,141.4 91.625,145.925 92.175,145.925 93.175,146.925 R21.1
LED2: R20.1 U7.9 | length 71.7
  Top Layer w0.2: v1(90.922,106.25) 91.161,106.011 91.161,95.425 90.7,94.964 90.7,93.186 91.161,92.725 91.161,87.018 92.877,85.302 92.877,82.596 92.23,81.949 U7.9
  Bottom Layer w0.2: R20.1 88.025,145.3 86.65,143.925 86.65,140.525 90.175,137 90.175,135.075 91.625,133.625 91.625,132.875 90.925,132.175 90.925,128 90.575,127.65 90.575,106.597 v1(90.922,106.25)
LIGHT_INT: R16.2 U5.4 U7.38 | length 80.6
  Top Layer w0.2: U7.38 97.5,79.084 97.816,79.4 98.574,79.4 99.9,80.726 99.9,82.562 100.156,82.819 100.156,83.921 101.025,84.79 101.025,86.165 101.575,86.715 101.985,87.125 103.875,87.125 104.025,87.275 104.025,88.775 v1@103.75,89.05 ; v1(103.05,147.75) 103.15,147.65 103.15,145.76 103.675,145.235 v1(103.675,96.575)
  Bottom Layer w0.2: U5.4 98.025,148.125 98.025,147.5 ; R16.2 98.025,147.5 ; v1(103.05,147.75) 101.875,147.75 101.6,147.475 98.05,147.475 98.025,147.5 ; v1(103.65,89.375) 103.65,91.774 103.599,91.825 103.599,93.302 102.95,93.951 102.95,95.85 v1(103.675,96.575)
MSP430_CLK_INT: U2.6 U7.6 | length 37.1
  Top Layer w0.2: U7.6 93.73,81.752 94.077,82.099 94.077,82.352 95.792,84.067 95.792,98.208 94.575,99.425 v1(94.575,101.425) ; v1(94.55,105.35) 95.384,105.35 97.38,107.345 97.38,110.47 97.049,110.8 96.3,110.8 95.75,111.35 U2.6
  Bottom Layer w0.2: v1(94.55,105.35) 94.55,101.45 v1(94.575,101.425)
NetA1_1: A1.1 R17.2 | length 0.7
  Top Layer w0.2: A1.1@89.6,50.625 R17.2
NetB1_1: B1.1 C21.1 R17.1 | length 20.1
  Top Layer w0.6: 89.6,53.075 C21.1
  Top Layer w1: 89.575,52.825 89.575,58.4 95.95,64.775 95.95,69.3
NetB1_3: B1.3 U7.26 | length 5
  Top Layer w0.254: U7.26 94.23,71.881 94.484,71.627 95.298,71.627 B1.3
NetB1_4: B1.4 U7.25 | length 4
  Top Layer w0.254: U7.25 93.73,71.37 B1.4
NetBQ1_1: BQ1.1 C22.2 U7.32 | length 7.4
  Top Layer w0.2: U7.32 97.979,76.084 98.895,77 100.201,77 100.351,77.15 101.825,77.15 BQ1.1 103.375,77.625 C22.2
NetBQ1_2: BQ1.2 C23.2 U7.33 | length 8.5
  Top Layer w0.2: U7.33 97.913,76.584 98.729,77.4 100.035,77.4 100.185,77.55 100.825,77.55 101.325,78.05 101.325,78.3 BQ1.2 C23.2
NetBQ2_1: BQ2.1 C26.2 U7.22 | length 7.4
  Top Layer w0.2: C26.2 90.17,70.158 90.442,70.43 BQ2.1@90.58,70.43 ; BQ2.1 BQ2.1@90.58,70.43 ; BQ2.1@90.627,70.43 BQ2.1@90.58,70.43 ; U7.22 92.23,74.255 91.9,73.925 91.9,72.637 91.7,72.437 91.7,71.55 BQ2.1@90.58,70.43
NetBQ2_3: BQ2.3 C27.2 U7.23 | length 7.1
  Top Layer w0.2: C27.2 91.7,68.942 91.7,69.026 91.7,70.799 92.5,71.599 BQ2.3 ; BQ2.3@92.542,71.517 92.542,71.905 92.3,72.147 92.3,73.672 92.73,74.102 U7.23
NetC2_2: C2.2 R2.1 U3.1 VT1.1 | length 6
  Bottom Layer w0.2: VT1.1@96.99,103.975 VT1.1 VT1.1@97,103.881 ; U3.1 U3.1@99.2,103.875
  Bottom Layer w0.5: VT1.1@96.99,103.975 U3.1 ; C2.2 VT1.1@97,103.881 ; R2.1 U3.1@99.2,103.875
NetC14_2: C14.2 R6.1 U2.3 | length 6
  Top Layer w0.2: C14.2 R6.1@92.275,110.05 ; 93.525,112.125 93.8,112.4 U2.3
  Top Layer w0.5: R6.1 92.3,110.9 93.525,112.125
NetC15_2: C15.2 U2.5 | length 4.5
  Top Layer w0.2: U2.5 95.1,114.775 95.425,115.1 C15.2
NetC16_1: C16.1 R10.1 U2.4 | length 5.4
  Top Layer w0.2: 94.45,112.175 U2.4 ; R10.1 C16.1
  Top Layer w0.5: 94.45,112.175 95.125,111.5 R10.1
NetC17_1: C17.1 F1.1 P1.1 P3.1 R15.1 U4.7 | length 20
  Top Layer w0.2: C17.1 81.2,150.75
  Top Layer w0.254: F1.1@80.375,149.975 F1.1@80.6,149.75
  Top Layer w0.3: U4.7 77.925,150.8 R15.1@78.75,149.975
  Top Layer w0.5: R15.1@78.75,149.975 F1.1@80.375,149.975
  Top Layer w1: F1.1@80.9,149.725 80.9,148.375 82.875,146.4 P1.1 ; F1.1@80.9,150.225 81.2,150.525 81.2,150.75 81.2,156.6 P3.1
NetC18_1: C18.1 R15.2 U4.8 | length 3.2
  Top Layer w0.2: U4.8 78.825,151.3 78.975,151.45 ; C18.1@78.95,151.925 78.975,151.9 78.975,151.45 ; R15.2@78.975,151.025 78.975,151.45
NetC24_1: C24.1 U7.40 | length 3
  Top Layer w0.2: U7.40 97.005,82.23 97.275,82.5 C24.1
NetD1_1: D1.1 R14.2 | length 1.6
  Bottom Layer w0.2: D1.1 R14.2@103.775,112.375
NetD2_1: D2.1 R20.2 | length 1.5
  Bottom Layer w0.2: D2.1 86.55,149.425 R20.2
NetD3_1: D3.1 R21.2 | length 1.6
  Bottom Layer w0.2: D3.1 93.142,149.401 R21.2
NetD4_1: D4.1 R27.2 | length 5.5
  Top Layer w0.2: R27.2 94.4,141.975 95,141.375 95.75,141.375 96.75,140.375 D4.1
NetD4_2: D4.2 Q2.3 | length 3.4
  Top Layer w0.2: Q2.3 91.625,140.375 D4.2
NetF1_2: F1.2 Q1.3 R3.2 | length 15.4
  Top Layer w0.2: Q1.3 91.725,148.575 R3.2
  Top Layer w0.254: v1@83.6,148.15 v1(83.825,147.925)
  Top Layer w0.5: v1@83.6,148.15 F1.2@83.6,149.725 ; v1(86.65,145.35) 87.95,145.35 89.125,146.525 89.125,147.7 90.35,148.925 Q1.3
  Bottom Layer w0.254: v1@86.4,145.35 v1(86.65,145.35)
  Bottom Layer w0.5: v1(83.825,147.925) v1@86.4,145.35
NetL1_1: L1.1 U1.2 | length 2.7
  Top Layer w0.2: L1.1@99.6,146.3 L1.1
  Top Layer w0.3: U1.2 97.725,146.35
  Top Layer w0.4: 97.725,146.35 L1.1@99.55,146.35
NetL3_1: L3.1 R22.1 | length 1.2
  Bottom Layer w0.2: R22.1 L3.1
NetL3_2: L3.2 U7.30 | length 2.4
  Top Layer w0.2: U7.30 96.23,74.345 96.396,74.179 v1(96.88,74.179)
  Bottom Layer w0.2: L3.2 96.266,73.541 96.825,74.1 96.85,74.1 96.875,74.075 96.876,74.075 96.88,74.078 v1(96.88,74.179)
NetP1_2: P1.2 P3.2 R12.1 U4.6 | length 25.8
  Top Layer w0.254: P3.2@82.875,155.735 P3.2
  Top Layer w0.3: U4.6 77.425,150.3 77.875,149.85 R12.1 R12.1@78,149.35 ; R12.1@78.05,149.35 R12.1@78,149.35 ; R12.1@78.275,149.075 R12.1@78,149.35
  Top Layer w0.5: R12.1@78.275,149.075 79.2,149.075 ; 78.975,148.725 79,148.7
  Top Layer w1: 79,148.7 79,146.885 P1.2 83.16,143.01 85.325,145.175 85.325,150.925 83,153.25 P3.2
NetP2_2: P2.2 R5.2 | length 2.3
  Top Layer w0.2: P2.2 92.34,124.35 R5.2
NetP2_3: P2.3 R8.2 | length 4.9
  Top Layer w0.2: P2.3 92.4,127.63 R8.2@96.745,127.63
NetP4_5: P4.5 R23.1 | length 1.6
  Top Layer w0.2: R23.1@93.125,90.175 94.737,90.175 P4.5
NetP4_9: P4.9 R29.1 | length 1.9
  Top Layer w0.5: R29.1 94.667,95.325 P4.9
NetQ1_1: Q1.1 R11.1 | length 1.5
  Top Layer w0.2: R11.1 Q1.1
NetQ2_1: Q2.1 R28.1 R30.1 | length 4.3
  Top Layer w0.2: Q2.1 90.65,137.925 R28.1 93.2,136.575 R30.1
NetR1_1: R1.1 R4.2 R8.1 U2.10 | length 10.2
  Top Layer w0.2: U2.10 95.1,120.8 95.913,121.612 95.913,122.688 96.75,123.525 R8.1 R4.2 R1.1
NetR6_2: R6.2 R9.2 R10.2 VT1.2 | length 7.6
  Top Layer w0.254: 93.323,108.098 R9.2
  Top Layer w0.5: R6.2 92.325,108.5 R9.2 R10.2 ; VT1.2 93.323,108.098
NetR13_1: R13.1 U4.2 | length 5
  Top Layer w0.2: U4.2 73.05,150.8 73.05,153.875 R13.1
NetR14_1: R14.1 U2.7 | length 7
  Top Layer w0.2: U2.7 96.4,112.825 96.7,112.525 v1(98.6,112.525)
  Bottom Layer w0.2: v1(98.6,112.525) 102.175,112.525 R14.1
NetR24_1: R24.1 S1.1 | length 1.5
  Top Layer w0.2: S1.1@102.825,91.375 R24.1
PIR_IO: U2.2
PIR_POWER: U2.13
PIR_RESET: R1.2 U7.18 | length 60.6
  Top Layer w0.2: v1(89.55,75.675) 89.65,75.675 90.559,76.584 U7.18 ; v1(98.275,122.875) R1.2 ; v1(98.475,91.625) 98.45,91.65 98.45,94.65 101.475,97.675 101.475,105.55 v1(99.375,107.65)
  GND-Layer 1 w0.2: v1(89.55,75.675) 92.98,79.105 92.98,80.264 93.029,80.314 93.029,83.461 92.98,83.51 92.98,85.625 92.275,86.33 92.275,90.375 93.125,91.225 98.075,91.225 v1(98.475,91.625)
  Bottom Layer w0.2: v1(98.275,122.875) 98.275,113.55 97.72,112.995 97.72,109.155 99.4,107.475 99.4,107.425 v1(99.375,107.65)
PIR_TEST: R5.1 U2.11 | length 3.5
  Top Layer w0.2: R5.1 94.45,122.5 U2.11
REG_ON_OFF: U1.5 U7.19 | length 107.7
  Top Layer w0.2: v1(90.129,73.904) 90.129,74.021 90.025,74.125 89.976,74.076 89.957,74.076 89.904,74.129 89.95,74.174 89.95,75.014 90.297,75.362 90.297,75.728 90.654,76.084 U7.19 ; v1@97.175,143.425 97.175,143.525 97.725,144.075 U1.5 ; v1@102.75,138.975 103.275,138.45 103.275,109.5 102.875,109.1 v1(102.875,108.725)
  GND-Layer 1 w0.2: v1(90.129,73.904) 90.129,67.53 92.759,64.9 94.209,64.9 94.8,65.491 94.8,76.081 95.55,76.831 95.55,78.725 97.75,80.925 98.825,80.925 99.875,79.875 102.375,79.875 103.025,80.525 103.025,82.3 v1(102.4,82.925)
  VCC-Layer 2 w0.2: v1(97.275,143.25) 98.425,143.25 v1(102.85,138.825)
  Bottom Layer w0.2: v1@102.675,82.775 102.4,83.05 102.4,84.575 104.5,86.675 104.5,107.1 v1(102.875,108.725)
REG_STAT: R7.2 U1.1 U7.5 | length 80.5
  Top Layer w0.2: U7.5 94.23,81.686 94.477,81.933 94.477,82.176 95.851,83.55 95.875,83.55 96.192,83.867 96.192,85.592 96.925,86.325 98.125,86.325 98.875,87.075 98.875,88.95 100.4,90.475 104.225,90.475 104.45,90.7 104.45,145.45 v1(103.85,146.05) ; U1.1 98.651,145.675 98.951,145.375 101.25,145.375 v1@101.638,145.762 ; R7.2 101.75,144.375 101.75,145.65 v1@101.638,145.762 ; v1@101.638,145.762 v1(101.7,145.825) 101.575,145.825 v1@101.638,145.762
  Bottom Layer w0.2: v1(101.7,145.825) 103.625,145.825 v1(103.85,146.05)
REINIT: C29.1 R26.2 S2.1 U7.37 | length 21.5
  Top Layer w0.2: U7.37 97.565,78.584 97.981,79 98.74,79 100.3,80.56 100.3,82.325 v1(101.45,83.475)
  Bottom Layer w0.2: C29.1@100.65,84.35 R26.2@100.65,85.675 ; v1(101.45,83.475) 101.4,83.475 C29.1 101.54,84.325 103.275,86.06 103.275,86.525 102.8,87 102.8,92.4 S2.1
SCL: P5.2 R19.1 U2.8 U4.4 U5.5 U6.6 U7.7 U8.6 | length 205.7
  Top Layer w0.2: U4.4 73.775,142.9 74.85,141.825 84.9,141.825 87.483,144.408 88.533,144.408 89.516,143.425 95.221,143.425 95.671,142.975 96.05,142.975 v1(96.825,142.2) 97.175,141.85 98.75,141.85 99.4,141.2 99.4,130.275 v1(99.225,130.275) ; P5.2 78.715,60.75 83.375,60.75 v1(84.425,61.8) ; U7.7 93.23,81.817 93.677,82.264 93.677,85.633 91.961,87.349 91.961,91.55 92.85,92.439 92.85,94.125 91.961,95.014 91.961,100.736 93.3,102.075 93.991,102.075 95.225,103.309 95.225,104.059 98.458,107.292 98.458,108.242 99.8,109.584 99.8,116.416 99.028,117.187 97.203,117.187 96.4,117.991 U2.8 96.4,120.6 97.575,121.775 99.191,121.775 101.425,124.009 101.425,129.19 101.425,129.65 v1(100.8,130.275) ; v1(98.775,67.175) R19.1@99.7,67.175 ; R19.1 100.5,67.25 100.792,66.958 U6.6 ; v1(102.275,86.425) 103.4,85.3 v1(104.125,85.3)
  GND-Layer 1 w0.2: v1@98.55,67.2 96.775,67.2 95.6,68.375 95.6,75.75 96.35,76.5 96.35,78.275 97.05,78.975 98.816,78.975 98.966,79.125 99.494,79.125 99.544,79.075 102.8,79.075 104.125,80.4 104.125,83.725 v1(104.125,85.3)
  Bottom Layer w0.2: v1@84.275,61.6 96.75,61.6 97.5,62.35 97.5,65.9 v1(98.775,67.175) ; v1(92.9,94) 93.1,94.2 95.177,94.2 95.792,94.815 95.792,96.242 96.85,97.3 99.6,97.3 100.25,96.65 100.25,93.469 99.975,93.194 99.975,89.519 99.925,89.469 99.925,86.95 100.225,86.65 102.05,86.65 v1(102.275,86.425) ; v1(96.825,142.2) 96.785,142.2 95.5,143.485 95.5,147.3 97.125,148.925 U5.5 ; v1(99.225,130.275) v1(100.8,130.275) 101.785,131.26 U8.6
SDA: P5.3 R18.1 U2.9 U4.3 U5.6 U6.1 U7.8 U8.5 | length 207.3
  Top Layer w0.2: U4.3 73.125,150.3 72.9,150.075 72.9,142.725 74.25,141.375 87.375,141.375 89,143 94.656,143 v1(95.524,142.132) 95.743,142.132 96.425,141.45 98.175,141.45 98.95,140.675 98.95,132 98.3,131.35 98.3,129.7 v1(99.1,128.9) ; U7.8 92.73,81.883 93.277,82.43 93.277,85.468 91.561,87.184 v1(91.561,94) 91.561,100.936 93.1,102.475 93.825,102.475 94.825,103.475 94.825,104.225 98.038,107.437 98.038,108.387 99.4,109.75 99.4,116.25 98.862,116.788 97.037,116.788 95.75,118.075 U2.9 95.75,120.575 97.35,122.175 99.025,122.175 100.725,123.875 v1(100.725,128.9) ; v1(98.7,63.925) R18.1@99.75,63.925 ; R18.1 99.817,63.958 U6.1 ; v1(101.75,85.525) 101.75,84.784 v1(103.405,83.129) v1@103.186,83.129
  GND-Layer 1 w0.2: v1@98.475,63.95 96.575,63.95 95.2,65.325 95.2,75.916 95.95,76.666 95.95,78.559 96.791,79.4 98.675,79.4 98.825,79.55 99.634,79.55 99.709,79.475 102.541,79.475 103.425,80.359 v1@103.425,83.425 ; v1@103.186,83.129 v1(103.405,83.129)
  Bottom Layer w0.2: P5.3 81.005,61 97.125,61 98.7,62.575 v1(98.7,63.925) ; v1(91.561,94) 91.91,94 92.61,93.3 93.19,93.3 93.69,93.8 95.343,93.8 96.192,94.649 96.192,96.076 96.966,96.85 98.825,96.85 99.85,95.825 99.85,93.635 99.575,93.36 99.575,89.684 99.375,89.484 99.375,86.675 99.8,86.25 101.025,86.25 v1(101.75,85.525) ; v1(95.524,142.132) 94.55,143.106 94.55,147.025 97.1,149.575 U5.6 ; v1(99.1,128.9) v1(100.725,128.9) 100.975,128.9 103.055,130.98 U8.5
TEMP1_ADC: C28.1 R25.1 RT1.1 U7.12 | length 29.5
  Top Layer w0.2: v1(90.5,82.025) 90.5,81.565 90.225,81.29 90.225,80.013 90.654,79.584 U7.12
  VCC-Layer 2 w0.2: v1(90.5,82.025) 90.5,81.565 90.225,81.29 90.225,80.71 91.61,79.325 95.425,79.325 96.175,78.575 96.175,71.35 97.325,70.2 v1(99.8,70.2)
  Bottom Layer w0.2: v1(99.8,70.2) 102.1,67.9 C28.1 102.1,66.625 RT1.1 102.55,66.175 R25.1
TEMP_ON: R25.2 U7.13 | length 35.1
  Top Layer w0.2: v1(90.204,83.029) 90.204,83.254 89.8,82.85 89.8,79.872 90.513,79.159 90.88,79.159 U7.13
  VCC-Layer 2 w0.2: v1(90.204,83.029) 89.8,82.625 89.8,80.569 92.025,78.344 92.025,71.875 97.9,66 97.9,62.9 99,61.8 v1(100.975,61.8)
  Bottom Layer w0.2: v1(100.975,61.8) R25.2@100.975,64.425
VCC: C1.1 C4.1 C19.1 C20.1 L1.2 L2.1 P2.1 P4.2 R4.1 R7.1 R16.1 R18.2 R19.2 R26.1 U1.6 U2.1 U5.1 U6.5 U8.8 | length 141
  Top Layer w0.2: C1.1 91.125,113.8 U2.1 92.5,117.075 v1(92.725,117.3) ; P2.1 90.8,123.35 90.8,127.95 91.35,128.5 93.975,128.5 94.375,128.9 97,128.9 R4.1 99.5,127.625 100,128.125 100,139.25 101.15,140.4 101.15,141.975 ; P4.2 98.325,84.047 L2.1 ; R19.2 98.35,66.25 98.025,66.575 98.025,68.05 98.354,68.379 C20.1 ; R18.2 R19.2@99.8,66.225 ; v1(101.05,70.6) 102.682,68.968 C20.1 ; R7.1@101.9,143.125 102.675,143.125 102.675,146.1 102.125,146.65 v1(102.125,146.875) ; U6.5 102.682,67.093 C20.1
  Top Layer w0.254: L1.2 L1.2@100.346,144.575 ; 101.15,141.975 101.9,142.725 101.9,143.125 R7.1 R7.1@101.696,143.225
  Top Layer w0.3: C4.1@98.225,143.425 U1.6@98.225,144.475 ; L1.2@100.346,144.575 R7.1@101.696,143.225
  Top Layer w0.4: U1.6@98.325,144.575 L1.2
  VCC-Layer 2 w0.2: v1(92.725,117.3) 92.725,116.05 101.95,106.825 101.95,91.25 99.95,89.25 99.95,83.343 100,83.293 100,81.1 101.7,79.4 101.7,77.35 100.95,76.6 100.95,70.7 v1(101.05,70.6) ; P4.2 99.54,85.09 99.95,85.5
  Bottom Layer w0.2: P2.1 92.725,121.425 v1(92.725,117.3) ; P4.2 99.04,85.09 R26.1 ; R16.1 99.05,146.875 v1(102.125,146.875) 103.45,146.875 103.75,147.175 103.75,148.04 102.466,149.325 C19.1 101.05,149.575 U5.1
  Bottom Layer w0.254: U8.8 99.245,134.805 v1(100.175,133.875)
  other v1: 101.021,143.9
WKUP: U2.12 U7.36 | length 53
  Top Layer w0.2: U2.12 93.8,117.775 v1(94.05,117.525) ; U7.36 97.631,78.084 98.147,78.6 98.906,78.6 100.7,80.394 100.7,80.75 v1(101.05,81.1)
  GND-Layer 1 w0.2: v1(94.05,117.525) 99.25,117.525 101.725,115.05 101.725,91.575 100.05,89.9 100.05,84.692 98.6,83.243 98.6,82.663 99.01,82.253 99.897,82.253 v1(101.05,81.1)
pads on no net: S2.3 U3.3 U4.1 U6.3 U6.4 U8.3 U8.7

## Polygon pours and split planes (outlines as drawn)
GND on Top Layer "VCC-Layer 2-No Net" (solid, pour order 16): 89.55,51.025 72.175,51.025 72.175,63.75 84.875,63.75 89.55,68.425 89.55,68.45
GND on Top Layer "GND_POLYGON_BOTTOM" (solid, pour order 13): 72.65,160.15 100.55,160.15 100.575,160.15 104.65,156.075 104.65,48.175 104.65,48.15 100.575,44.075 89.55,44.075 89.55,136 89.525,136.025 84.45,141.1 72.65,141.1
GND on GND-Layer 1 "VCC-Layer 2-No Net" (solid, pour order 15): 89.55,51.025 72.175,51.025 72.175,63.75 84.875,63.75 89.55,68.425 89.55,68.45
GND on GND-Layer 1 "GND_POLYGON_BOTTOM" (solid, pour order 11): 72.65,160.15 100.55,160.15 100.575,160.15 104.65,156.075 104.65,48.175 104.65,48.15 100.575,44.075 89.55,44.075 89.55,136 89.525,136.025 84.45,141.1 72.65,141.1
VCC on VCC-Layer 2 "VCC-Layer 2-No Net" (solid, pour order 12): 89.55,51.02 89.546,51.025 72.175,51.025 72.175,63.725 72.15,63.75 75.792,63.75 84.874,63.75 85.317,64.2 89.55,68.5 89.55,68.66
VCC on VCC-Layer 2 "GND_POLYGON_BOTTOM" (solid, pour order 10): 72.65,160.15 100.55,160.15 100.575,160.15 104.65,156.075 104.65,48.175 104.65,48.15 100.575,44.075 89.55,44.075 89.55,136 89.525,136.025 84.45,141.1 72.65,141.1
GND on Bottom Layer "VCC-Layer 2-No Net" (solid, pour order 14): 89.55,51.025 72.175,51.025 72.175,63.75 84.875,63.75 89.55,68.425 89.55,68.45
GND on Bottom Layer "GND_POLYGON_BOTTOM" (solid, pour order 9): 72.65,160.15 100.55,160.15 100.575,160.15 104.65,156.075 104.65,48.175 104.65,48.15 100.575,44.075 89.55,44.075 89.55,136 89.525,136.025 84.45,141.1 72.65,141.1

## Keep-outs
Keep-Out Layer:
  lines w0.1: 88.519,43.053 100.584,43.053 ; 84.455,64.135 88.519,68.199 ; 84.455,64.135 71.628,64.135 71.628,43.053 100.584,43.053 ; 84.455,64.135 88.519,68.199 ; 84.455,140.081 88.519,136.017 ; 84.455,140.081 71.628,140.081 71.628,161.163 100.584,161.163 ; 84.455,140.081 88.519,136.017 ; 88.519,68.199 88.519,136.017 ; 100.584,43.053 105.664,48.133 ; 100.584,43.053 105.664,48.133 ; 100.584,43.053 105.664,48.133 ; 100.584,43.053 105.664,48.133 ; 100.584,161.163 105.664,156.083 ; 100.584,161.163 105.664,156.083 ; 105.664,48.133 105.664,156.083

## Other copper
Top Layer:
  rectangle: 91.375,45.042 100.392,45.55
  rectangle: 92.95,49.025 95.25,50.25
  rectangle net GND: 90.3,51.025 93.5,51.825
  pour cut-out: 100.976,53.025 101.103,52.517 101.357,52.009 101.738,51.755 102.246,51.501 102.627,51.501 103.389,51.755 103.77,52.136 104.024,52.898 104.024,53.152 103.897,53.66 103.643,54.041 103.135,54.422 102.5,54.549 101.992,54.422 101.484,54.168 101.103,53.66
  pour cut-out: 72.401,52.975 72.528,52.467 72.782,51.959 73.163,51.705 73.671,51.451 74.052,51.451 74.814,51.705 75.195,52.086 75.449,52.848 75.449,53.102 75.322,53.61 75.068,53.991 74.56,54.372 73.925,54.499 73.417,54.372 72.909,54.118 72.528,53.61
  pour cut-out: 72.426,158.875 72.553,158.367 72.807,157.859 73.188,157.605 73.696,157.351 74.077,157.351 74.839,157.605 75.22,157.986 75.474,158.748 75.474,159.002 75.347,159.51 75.093,159.891 74.585,160.272 73.95,160.399 73.442,160.272 72.934,160.018 72.553,159.51
  pour cut-out: 90.302,51.023 105.702,51.023 105.666,50.988 105.666,48.131 100.586,43.051 71.63,43.051 71.63,51.02 71.627,51.023
  pour cut-out: 105.625,62.85 98.125,62.85 98.125,69.1 105.664,69.1
GND-Layer 1:
  pour cut-out: 90.3,51.025 105.7,51.025 105.664,50.989 105.664,48.133 100.584,43.053 71.628,43.053 71.628,51.022 71.625,51.025
  pour cut-out: 105.625,62.85 98.125,62.85 98.125,69.1 105.664,69.1
VCC-Layer 2:
  pour cut-out: 90.305,51.02 105.705,51.02 105.669,50.985 105.669,48.128 100.589,43.048 71.633,43.048 71.633,51.018 71.63,51.02
  pour cut-out: 105.625,62.85 98.125,62.85 98.125,69.1 105.664,69.1
Bottom Layer:
  pour cut-out: 100.976,53.025 101.103,52.517 101.357,52.009 101.738,51.755 102.246,51.501 102.627,51.501 103.389,51.755 103.77,52.136 104.024,52.898 104.024,53.152 103.897,53.66 103.643,54.041 103.135,54.422 102.5,54.549 101.992,54.422 101.484,54.168 101.103,53.66
  pour cut-out: 72.401,52.975 72.528,52.467 72.782,51.959 73.163,51.705 73.671,51.451 74.052,51.451 74.814,51.705 75.195,52.086 75.449,52.848 75.449,53.102 75.322,53.61 75.068,53.991 74.56,54.372 73.925,54.499 73.417,54.372 72.909,54.118 72.528,53.61
  pour cut-out: 72.426,158.875 72.553,158.367 72.807,157.859 73.188,157.605 73.696,157.351 74.077,157.351 74.839,157.605 75.22,157.986 75.474,158.748 75.474,159.002 75.347,159.51 75.093,159.891 74.585,160.272 73.95,160.399 73.442,160.272 72.934,160.018 72.553,159.51
  pour cut-out: 90.3,51.025 105.7,51.025 105.664,50.989 105.664,48.133 100.584,43.053 71.628,43.053 71.628,51.022 71.625,51.025
  pour cut-out: 105.625,62.85 98.125,62.85 98.125,69.1 105.664,69.1

## Silkscreen, mask and mechanical layers (free items; w line width, h text height)
Top Overlay:
  lines w0.254: 98.025,72.475 98.65,72.475 ; 98.025,72.85 98.7,72.85 ; 98.4,71.6 98.4,72.475 ; 98.4,72.875 98.4,73.7 ; 99.05,72.5 99.675,72.5 ; 99.05,72.875 99.725,72.875 ; 99.425,71.625 99.425,72.5 ; 99.425,72.9 99.425,73.725 ; 100.05,72.475 100.675,72.475 ; 100.05,72.85 100.725,72.85 ; 100.425,71.6 100.425,72.475 ; 100.425,72.875 100.425,73.7
  text "ASE V 1.30" at 73.5,48.2 h1.52
Bottom Overlay:
  lines w0.254: 80.95,159.9 81.65,159.9 ; 80.975,147.1 81.625,147.1 ; 81,154.525 81.65,154.525 ; 81.05,141.625 81.625,141.625
Mechanical 1:
  lines w0.254: 84.455,140.081 84.455,141.097 ; 86.484,148.759 86.484,152.609 ; 86.492,152.609 91.6,152.609 ; 86.5,156.934 91.608,156.934 98.849,156.934 ; 88.519,44.069 100.584,44.069 ; 88.519,136.017 89.535,136.017 ; 89.535,43.053 89.535,136.017 ; 91.6,148.759 91.6,152.609 ; 93.472,58.039 96.52,58.039 ; 93.599,102.108 95.123,102.108 ; 95.123,101.092 95.123,102.108 ; 95.123,103.124 95.123,102.108 ; 96.393,102.108 95.123,102.108 ; 96.52,54.991 96.52,58.039 ; 96.52,61.087 96.52,58.039 ; 97.028,73.66 98.679,75.311 104.648,75.311 ; 98.025,43.05 98.025,64.75 98.025,76.9 98.05,76.925 105.65,76.925 ; 98.841,148.759 98.841,152.609 ; 98.841,150.151 98.841,152.609 ; 99.568,58.039 96.52,58.039 ; 100.584,43.053 100.584,44.069 ; 100.584,161.163 100.584,160.147 ; 105.664,48.133 104.648,48.133 ; 105.664,156.083 104.648,156.083 ; 84.455,141.097 71.628,141.097 71.628,140.081 72.644,140.081 72.644,161.163 71.628,161.163 71.628,160.147 100.584,160.147 ; 84.455,141.097 89.535,136.017 ; 91.6,152.609 98.841,152.609 ; 100.584,44.069 104.648,48.133 ; 100.584,160.147 104.648,156.083 ; 104.648,48.133 104.648,156.083

## Text inside footprints (layer, text, board x,y; h text height)
P4: Bottom Overlay "10" at 96.774,96.774 h1.27 r270; Bottom Overlay "9" at 94.234,96.774 h1.27 r270; Bottom Overlay "1" at 94.234,83.058 h1.27 r270; Bottom Overlay "2" at 96.774,82.55 h1.27 r270